# Altium PCB 智能灯_灯泡.PcbDoc
Units mm, origin at the board's own origin, x right, y up, seen from the top; angles counter-clockwise.
Board outline 152.4 x 101.6 mm, 2 copper layers (Top Layer, Bottom Layer); 17 components, 4 nets, 68 pads, 16 vias.
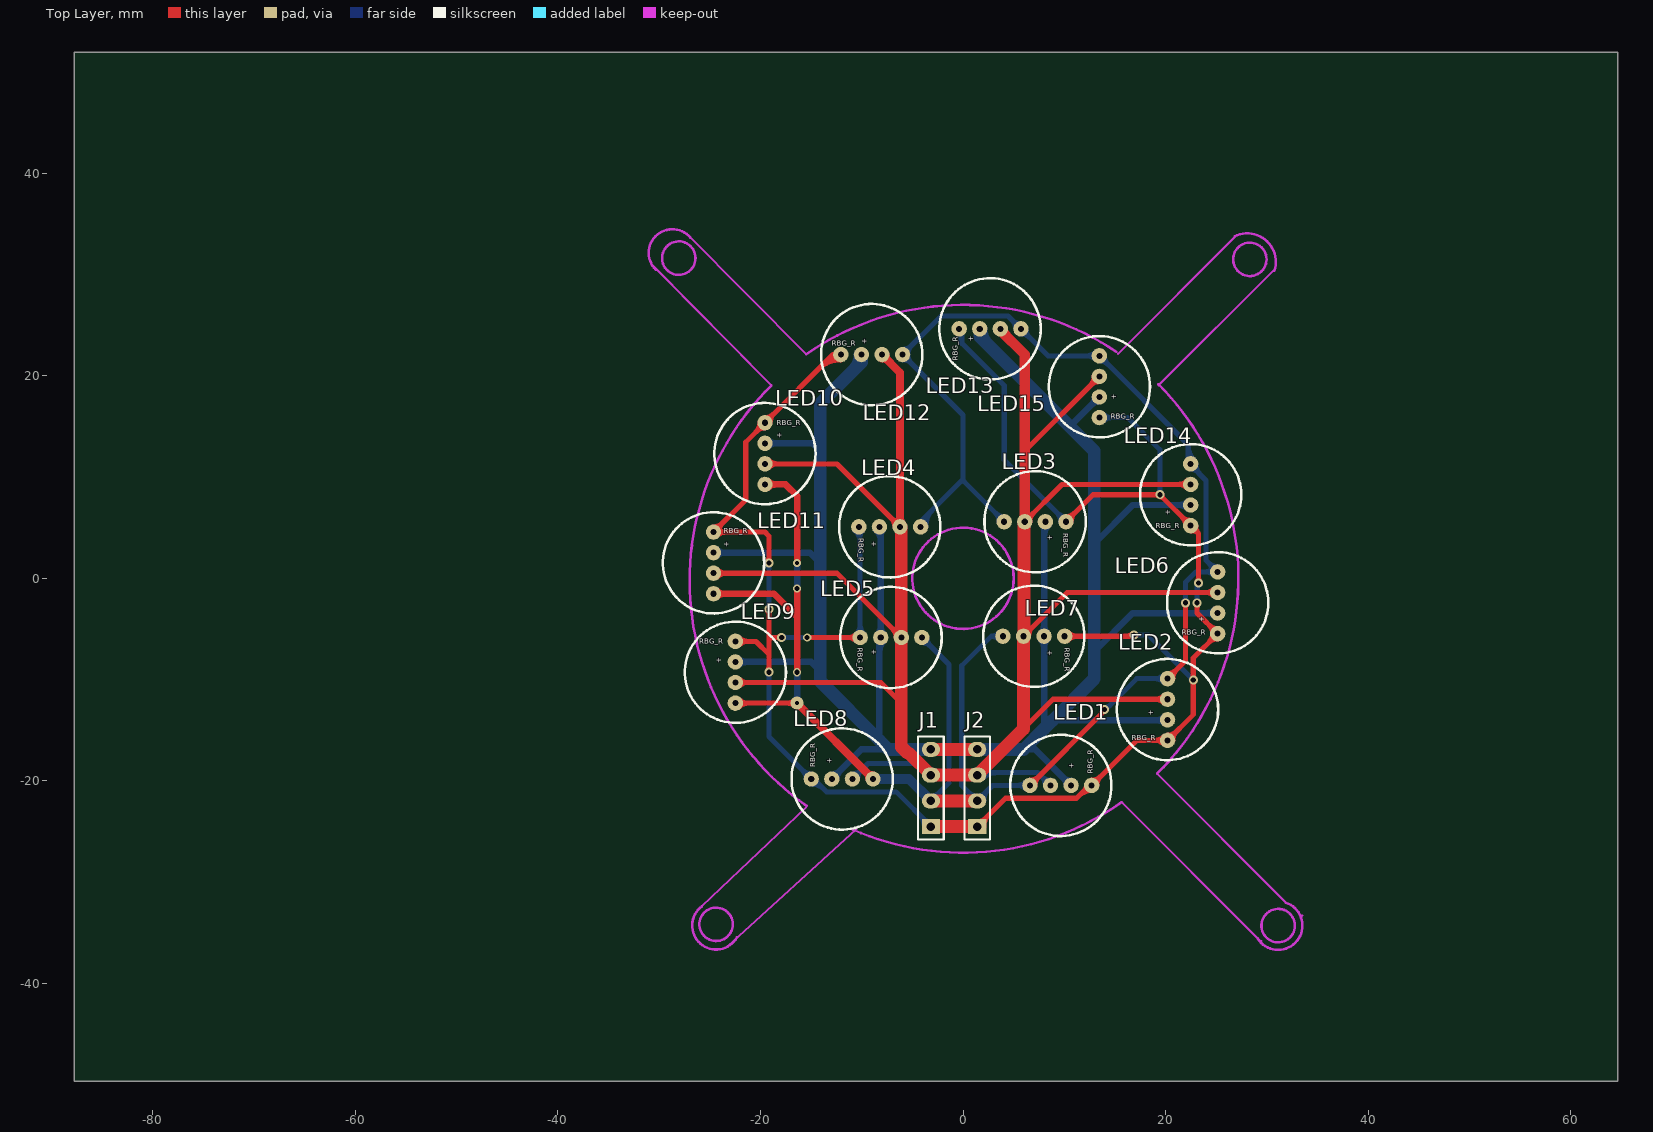
[diagram p0: Top Layer view]
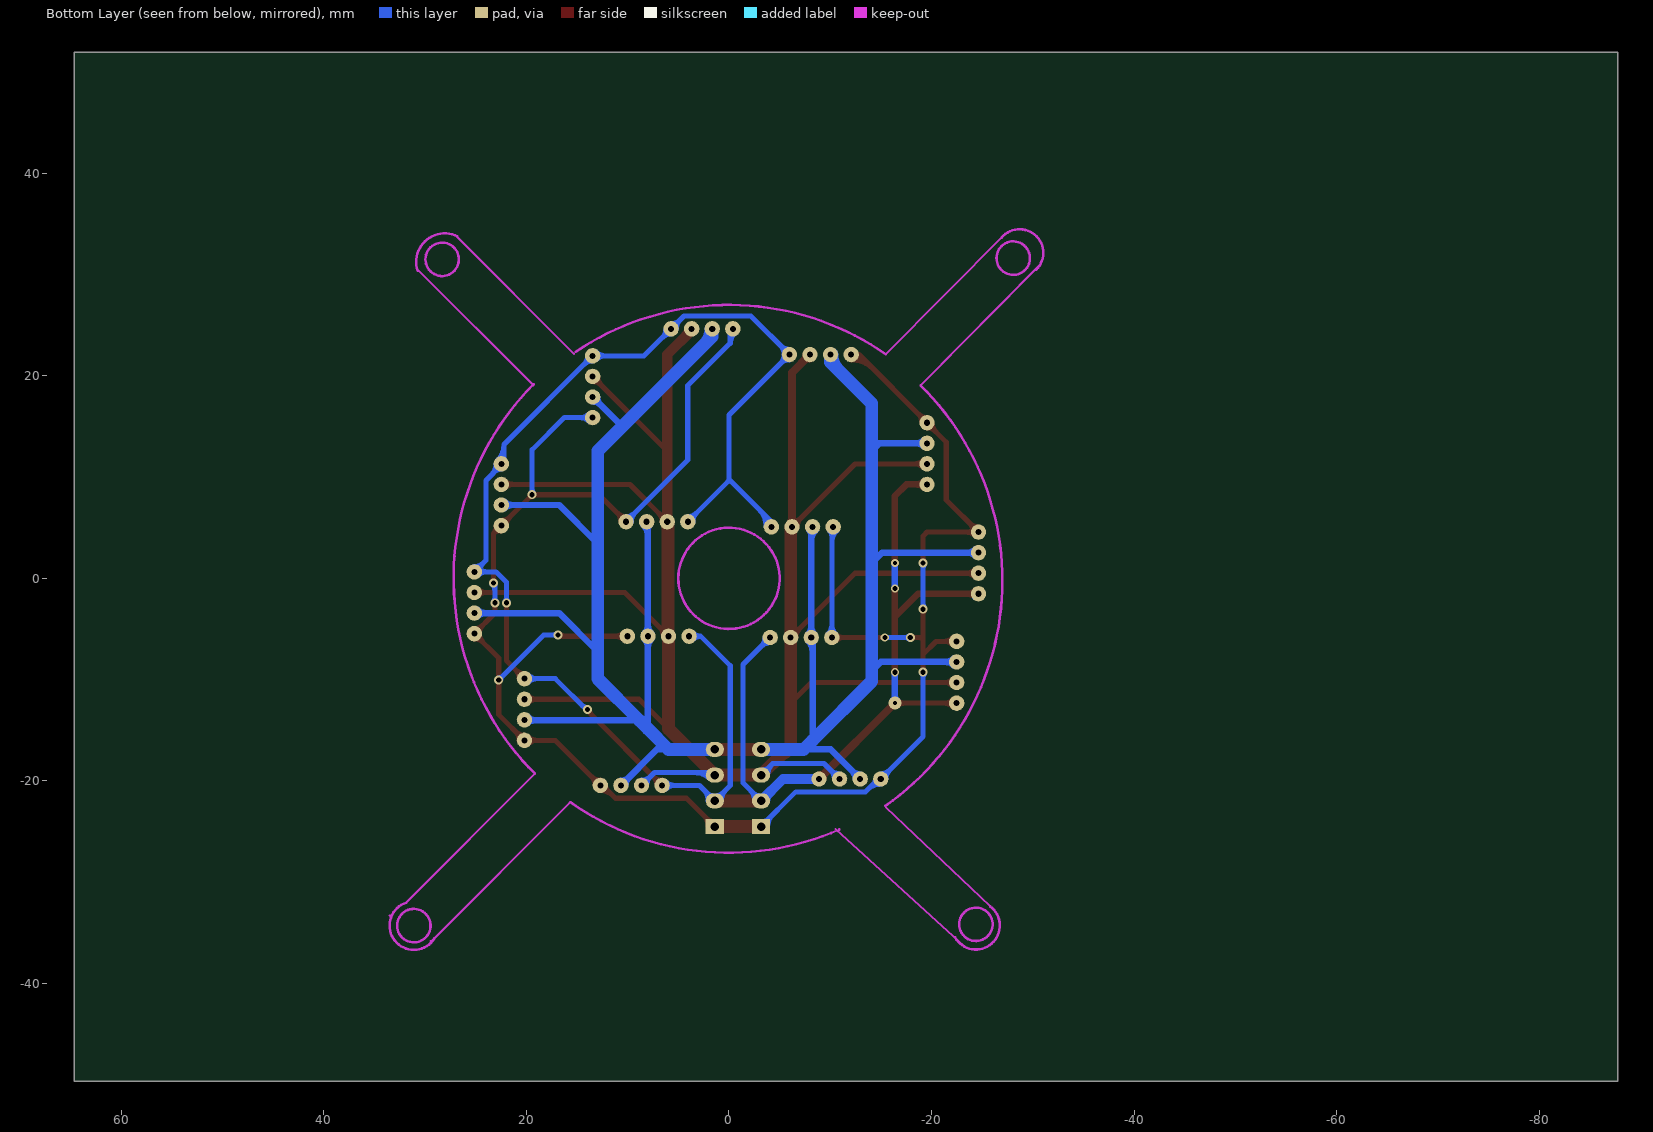
[diagram p1: Bottom Layer view, seen from below]

## Layer stack, top to bottom
Top Solder: solder mask 0.0102, Solder Resist, Dk 3.5
Top Layer: signal copper 0.0356
Dielectric 1: dielectric 0.32, FR-4, Dk 4.8
Bottom Layer: signal copper 0.0356
Bottom Solder: solder mask 0.0102, Solder Resist, Dk 3.5

## Board outline
-87.757,-49.657 64.643,-49.657 64.643,51.943 -87.757,51.943

## Design rules (kind name [scope] priority, off if disabled: settings)
Clearance [All] p1: gap=0.254
PolygonConnect [All] p1: connectstyle=Relief reliefconductorwidth=0.254 reliefentries=4 polygonreliefangle="90 Angle" airgapwidth=0.254
RoutingVias [All] p1: holewidth=0.508 width=0.762 viastyle="Through Hole" minholewidth=0.254 minwidth=0.508 maxholewidth=1.016 maxwidth=1.27
SolderMaskExpansion [All] p1: expansion=0.102
Width [All] p1: maxlimit=1.27 minlimit=0.254 preferedwidth=0.508
29 further rules are at their usual default settings.

## Components (designator, comment, footprint, x,y, rotation, side; value= is the part's Value field where it differs from the comment)
J1 "SIP4" P4_2.54-1 -3.175,-20.701 r90 top
J2 "SIP4" P4_2.54-1 1.397,-20.701 r90 top
LED1 "BGR" 10MMRBG 9.652,-20.447 r180 top
LED2 "BGR" 10MMRBG 20.193,-12.954 r90 top
LED3 "BGR" 10MMRBG 7.112,5.588 r180 top
LED4 "BGR" 10MMRBG -7.239,5.08 r0 top
LED5 "BGR" 10MMRBG -7.112,-5.842 r0 top
LED6 "BGR" 10MMRBG 25.146,-2.413 r90 top
LED7 "BGR" 10MMRBG 6.985,-5.715 r180 top
LED8 "BGR" 10MMRBG -11.938,-19.812 r0 top
LED9 "BGR" 10MMRBG -22.479,-9.271 r270 top
LED10 "BGR" 10MMRBG -19.558,12.319 r270 top
LED11 "BGR" 10MMRBG -24.638,1.524 r270 top
LED12 "BGR" 10MMRBG -9.017,22.098 r0 top
LED13 "BGR" 10MMRBG 2.667,24.638 r0 top
LED14 "BGR" 10MMRBG 22.479,8.255 r90 top
LED15 "BGR" 10MMRBG 13.462,18.923 r90 top

## Footprints (in the part's own frame and the unit in brackets; to place one, negate y for a bottom-side part, rotate by r counter-clockwise, add the part's x,y. Pads: shape width x height; smd on the part's side, far side on the other; paste and mask are expansions set on the pad)
10MMRBG [mil]
  round 60 hole 23.62: 1(-120,0) 2(-40,0) 3(40,0) 4(120,0)
  silkscreen extent -197,-197 197,197
P4_2.54-1 [mm]
  rect 1.5x1.8 hole 0.85: 1(-3.81,0)
  oval 1.5x1.8 hole 0.85: 2(-1.27,0) 3(1.27,0) 4(3.81,0)
  silkscreen extent -5.08,-1.27 5.08,1.27, body extent -5.08,-1.47 5.08,1.45, height 8.56

## Part data
LED1 LED2 LED3 LED4 LED5 LED6 LED7 LED8 LED9 LED10 LED11 LED12 LED13 LED14 LED15: library part LED_4P, "DUAL_LED共阳三色"

## Via types
v1: diameter 0.889, hole 0.508, Top Layer to Bottom Layer, 11 vias
v2: diameter 0.813, hole 0.508, Top Layer to Bottom Layer, 3 vias
v3: diameter 0.813, hole 0.381, Top Layer to Bottom Layer, 1 vias
v4: diameter 1.27, hole 0.381, Top Layer to Bottom Layer, 1 vias

## Nets (pads, with @x,y where several pads share a name; then routed paths per layer and width w, separated by ;. In a path a pad name is that pad's centre, name@x,y a point inside that pad or via, vN(x,y) a via of type N, cw(c..) or ccw(c..) an arc to the next point about the centre after c; other vN are vias at no path point)
5V: J1.4 J2.4 LED1.2 LED2.2 LED3.2 LED4.2 LED5.2 LED6.2 LED7.2 LED8.2 LED9.2 LED10.2 LED11.2 LED12.2 LED13.2 LED14.2 LED15.2 | length 255.1
  Top Layer w1.27: J1.4 J2.4
  Bottom Layer w0.635: LED11.2 -15.113,2.54 -14.097,1.524 ; LED11.2@-24.324,2.226 cw(c-23.565,1.467) -23.565,2.54 cw(c-23.565,3.613) LED11.2@-24.324,2.854 ; LED9.2 -14.986,-8.255 -14.097,-9.144 ; LED9.2@-22.165,-8.569 cw(c-21.406,-9.328) -21.406,-8.255 cw(c-21.406,-7.182) LED9.2@-22.165,-7.941 ; LED10.2 -14.859,13.335 -14.097,12.573 ; LED10.2@-19.244,13.021 cw(c-18.485,12.262) -18.485,13.335 cw(c-18.485,14.408) LED10.2@-19.244,13.649 ; -14.297,8.074 -14.097,8.074 ; LED8.2 -10.033,-16.891 -7.366,-16.891 ; LED8.2@-12.954,-19.367 ccw(c-12.954,-18.294) -12.195,-19.053 ccw(c-11.436,-19.812) LED8.2@-12.509,-19.812 ; LED4.2@-8.569,4.766 cw(c-9.635,3.7) -8.128,3.7 ; LED5.2@-8.442,-6.156 cw(c-8.895,-6.609) -8.255,-6.609 ; LED5.2@-8.442,-5.528 ccw(c-9.201,-4.769) -8.128,-4.769 ccw(c-7.055,-4.769) LED5.2@-7.814,-5.528 ; -8.255,-16.002 -8.255,-5.969 LED5.2 -8.128,4.953 LED4.2 ; -8.255,-7.222 cw(c-6.748,-7.222) LED5.2@-7.814,-6.156 ; -8.128,4.313 cw(c-7.488,4.313) LED4.2@-7.941,4.766 ; 5.969,-16.891 7.112,-16.891 LED1.2 ; LED7.2@7.687,-6.029 cw(c6.928,-6.788) 8.001,-6.788 cw(c9.074,-6.788) LED7.2@8.315,-6.029 ; LED7.2@7.687,-5.401 ccw(c6.928,-4.642) 8.001,-4.642 ccw(c9.074,-4.642) LED7.2@8.315,-5.401 ; LED3.2@7.814,5.274 cw(c7.361,4.821) 8.001,4.821 ; 8.001,-14.859 LED7.2 8.001,5.461 LED3.2 ; 8.001,4.208 cw(c9.508,4.208) LED3.2@8.442,5.274 ; 8.826,-14.034 LED2.2@20.13,-14.034 ; LED1.2@10.223,-20.447 ccw(c9.15,-20.447) 9.909,-19.688 ccw(c10.668,-18.929) LED1.2@10.668,-20.002 ; 10.414,15.113 10.668,15.113 LED15.2 ; 12.954,-7.239 16.764,-3.429 LED6.2 ; 12.954,3.429 16.764,7.239 LED14.2 ; LED15.2@13.018,17.907 cw(c11.944,17.907) 12.703,17.148 cw(c13.462,16.389) LED15.2@13.462,17.462 ; 18.967,-14.034 ccw(c18.967,-12.744) LED2.2@19.879,-13.656 ; 19.273,-14.034 cw(c19.273,-14.89) LED2.2@19.879,-14.284 ; LED14.2@22.165,6.925 ccw(c21.406,6.166) 21.406,7.239 ccw(c21.406,8.312) LED14.2@22.165,7.553 ; LED6.2@24.832,-3.743 ccw(c24.073,-4.502) 24.073,-3.429 ccw(c24.073,-2.356) LED6.2@24.832,-3.115
  Bottom Layer w1.27: -14.097,-10.16 -8.255,-16.002 -7.366,-16.891 J1.4 ; -14.097,-10.033 -14.097,-9.144 -14.097,-3.302 ; -14.097,-3.175 -14.097,1.524 -14.097,8.074 -14.097,12.573 -14.097,17.272 -10.033,21.336 LED12.2 ; -10.789,20.58 ccw(c-12.306,22.098) LED12.2@-10.16,22.098 ; J2.4 5.969,-16.891 8.001,-14.859 8.826,-14.034 12.954,-9.906 12.954,-7.239 12.954,3.429 12.954,12.573 10.414,15.113 1.651,23.876 LED13.2 ; LED13.2@1.778,24.638 ccw(c3.924,24.638) 2.407,23.12 ; LED2.2@20.13,-14.034 LED2.2
RBG_B: J1.2 J2.2 LED1.4 LED2.4 LED3.4 LED4.4 LED5.4 LED6.4 LED7.4 LED8.4 LED9.4 LED10.4 LED11.4 LED12.4 LED13.4 LED14.4 LED15.4 | length 266.2
  Top Layer w0.508: LED9.4 v4(-16.383,-12.319) ; LED9.4@-22.12,-12.678 cw(c-21.253,-13.545) -21.253,-12.319 cw(c-21.253,-11.093) LED9.4@-22.12,-11.96 ; v4@-16.652,-12.588 ccw(c-17.303,-13.239) -17.303,-12.319 ccw(c-17.303,-11.399) v4@-16.652,-12.05 ; LED1.4 13.97,-13.081 v1(13.97,-12.954) ; LED1.4@6.604,-19.939 ccw(c6.604,-18.713) 7.471,-19.58 ccw(c8.338,-20.447) LED1.4@7.112,-20.447 ; 13.555,-13.496 ccw(c13.013,-12.954) v1@13.779,-12.954 ; LED2.4 21.971,-8.128 v1(21.971,-2.413) ; LED2.4@20.193,-9.398 ccw(c20.193,-8.172) 21.06,-9.039 ccw(c21.927,-9.906) LED2.4@20.701,-9.906 ; v1@21.836,-2.548 cw(c21.511,-2.873) 21.971,-2.873 cw(c22.431,-2.873) v1@22.106,-2.548
  Top Layer w0.635: LED11.4 -18.669,-1.524 -16.383,-3.81 ; LED11.4@-24.324,-1.838 cw(c-23.565,-2.597) -23.565,-1.524 cw(c-23.565,-0.451) LED11.4@-24.324,-1.21 ; LED10.4 -17.526,9.271 -16.383,8.128 v3(-16.383,1.524) ; LED10.4@-19.244,8.957 cw(c-18.485,8.198) -18.485,9.271 cw(c-18.485,10.344) LED10.4@-19.244,9.585 ; v2(-16.383,-9.271) -16.383,-3.81 ; v2(-16.383,-1.016) -16.383,-3.81
  Top Layer w0.762: v4(-16.383,-12.319) LED8.4 ; LED8.4@-9.271,-19.812 ccw(c-10.191,-19.812) -9.54,-19.162 ccw(c-8.89,-18.511) LED8.4@-8.89,-19.431
  Top Layer w1.27: J1.2 J2.2
  Bottom Layer w0.508: LED11.4 LED11.4@-24.257,-1.905 ; LED9.4 LED9.4@-22.479,-12.083 ; LED12.4@-5.969,21.59 cw(c-5.969,20.364) -5.102,21.231 cw(c-4.235,22.098) -5.461,22.098 cw(c-4.235,22.098) -5.102,22.965 cw(c-5.969,23.832) LED12.4@-5.969,22.606 ; LED5.4@-4.064,-6.35 cw(c-4.064,-7.576) -3.197,-6.709 cw(c-2.33,-5.842) LED5.4@-3.556,-5.842 ; LED5.4 -1.397,-8.509 -1.397,-20.193 J1.2 ; -3.832,5.947 ccw(c-2.965,5.08) LED4.4 -4.191,5.588 0,9.779 0,16.129 LED12.4 -2.159,25.908 4.445,25.908 LED13.4 8.382,21.971 LED15.4 22.225,13.208 22.225,11.557 LED14.4 22.479,11.199 24.003,9.675 24.003,1.778 LED6.4 22.987,0.635 21.971,-0.381 v1(21.971,-2.413) ; LED4.4@-3.683,5.08 cw(c-1.23,5.08) -2.965,6.814 ; J1.2@-3.025,-21.475 ccw(c-3.025,-20.64) -2.434,-21.23 ; J1.2@-2.529,-21.971 cw(c-0.969,-21.971) -2.072,-20.868 ; 0.064,9.588 LED3.4 ; 0.294,-20.868 cw(c-0.809,-21.971) J2.2@0.751,-21.971 ; 0.656,-21.23 ccw(c1.247,-20.64) J2.2@1.247,-21.475 ; J2.2@1.547,-21.475 ccw(c1.547,-20.64) 2.138,-21.23 ; J2.2@2.043,-21.971 cw(c3.603,-21.971) 2.5,-20.868 ; LED3.4@3.556,5.588 ccw(c2.33,5.588) 3.197,6.455 ccw(c4.064,7.322) LED3.4@4.064,6.096 ; LED7.4@3.56,-6.055 ccw(c2.794,-6.747) 2.794,-5.715 ; LED7.4@3.56,-5.375 cw(c2.794,-4.683) 2.794,-5.715 ; LED7.4 2.794,-5.715 ; LED13.4@5.207,24.638 ccw(c3.981,24.638) 4.848,25.505 ccw(c5.715,26.372) LED13.4@5.715,25.146 ; LED13.4@5.715,24.13 cw(c5.715,22.904) 6.582,23.771 cw(c7.449,24.638) LED13.4@6.223,24.638 ; LED1.4@6.245,-20.806 ccw(c5.378,-21.673) 5.378,-20.447 ccw(c5.378,-19.221) LED1.4@6.245,-20.088 ; LED1.4 2.921,-20.447 J2.2 -0.127,-20.447 -0.127,-8.636 2.794,-5.715 ; LED15.4@13.103,21.612 ccw(c12.236,20.745) 12.236,21.971 ccw(c12.236,23.197) LED15.4@13.103,22.33 ; LED15.4@13.462,21.463 cw(c13.462,20.237) 14.329,21.104 cw(c15.196,21.971) LED15.4@13.97,21.971 ; v1(13.97,-12.954) 13.97,-13.081 17.145,-9.906 LED2.4 ; v1@13.97,-12.763 ccw(c13.97,-11.997) 14.512,-12.539 ; LED2.4@19.834,-10.265 ccw(c18.967,-11.132) 18.967,-9.906 ccw(c18.967,-8.68) LED2.4@19.834,-9.547 ; v1@21.836,-2.278 ccw(c21.511,-1.953) 21.971,-1.953 ccw(c22.431,-1.953) v1@22.106,-2.278 ; 22.225,13.143 ccw(c24.319,13.143) LED14.4@22.838,11.662 ; LED14.4@22.479,10.795 cw(c22.479,9.82) 23.168,10.509 ; LED14.4@22.987,11.303 ccw(c24.465,11.303) 23.42,10.258 ; LED6.4@24.638,0.635 ccw(c23.412,0.635) 24.279,1.502 ccw(c25.146,2.369) LED6.4@25.146,1.143 ; LED6.4@24.787,0.276 ccw(c23.92,-0.591) 23.92,0.635 ccw(c23.92,1.861) LED6.4@24.787,0.994
  Bottom Layer w0.635: v4@-16.608,-12.094 ccw(c-17.15,-11.552) -16.383,-11.552 ccw(c-15.616,-11.552) v4@-16.158,-12.094 ; v4(-16.383,-12.319) v2@-16.383,-9.398 ; v2(-16.383,-1.016) v3(-16.383,1.524)
  Bottom Layer w1.016: LED8.4 -5.334,-19.812 J1.2 ; -3.844,-21.302 cw(c-4.513,-21.971) J1.2@-3.567,-21.971
RBG_G: J1.3 J2.3 LED1.3 LED2.3 LED3.3 LED4.3 LED5.3 LED6.3 LED7.3 LED8.3 LED9.3 LED10.3 LED11.3 LED12.3 LED13.3 LED14.3 LED15.3 | length 269.2
  Top Layer w0.508: LED11.3 -12.446,0.508 LED5.3 ; LED11.3@-24.279,0.149 cw(c-23.412,-0.718) -23.412,0.508 cw(c-23.412,1.734) LED11.3@-24.279,0.867 ; LED9.3 -8.128,-10.287 -6.096,-12.319 ; LED9.3@-22.12,-10.646 cw(c-21.253,-11.513) -21.253,-10.287 cw(c-21.253,-9.061) LED9.3@-22.12,-9.928 ; LED10.3 -12.446,11.303 LED4.3 ; LED10.3@-19.199,10.944 cw(c-18.332,10.077) -18.332,11.303 cw(c-18.332,12.529) LED10.3@-19.199,11.662 ; LED4.3@-6.731,5.08 ccw(c-7.957,5.08) -7.09,5.947 ccw(c-6.223,6.814) LED4.3@-6.223,5.588 ; LED5.3@-6.604,-5.842 ccw(c-7.83,-5.842) -6.963,-4.975 ccw(c-6.096,-4.108) LED5.3@-6.096,-5.334 ; LED13.3@3.683,24.13 cw(c3.683,22.904) 4.55,23.771 cw(c5.417,24.638) LED13.3@4.191,24.638 ; LED13.3 6.096,22.225 6.096,22.102 6.096,21.844 ; 5.969,-14.859 8.89,-11.938 LED2.3 ; LED7.3 6.035,-5.649 10.287,-1.397 LED6.3 LED6.3@25.146,-1.161 ; LED7.3@5.969,-5.207 ccw(c5.969,-3.981) 6.836,-4.848 ccw(c7.703,-5.715) LED7.3@6.477,-5.715 ; LED3.3 9.779,9.271 LED14.3 ; LED3.3@6.096,6.096 ccw(c6.096,7.322) 6.963,6.455 ccw(c7.83,5.588) LED3.3@6.604,5.588 ; 6.096,12.573 LED15.3 ; LED1.3@8.4,-20.447 LED1.3 ; LED15.3@12.954,19.939 cw(c11.728,19.939) 12.595,19.072 cw(c13.462,18.205) LED15.3@13.462,19.431 ; LED2.3@19.834,-12.297 ccw(c18.967,-13.164) 18.967,-11.938 ccw(c18.967,-10.712) LED2.3@19.834,-11.579 ; LED14.3@22.12,8.912 ccw(c21.253,8.045) 21.253,9.271 ccw(c21.253,10.497) LED14.3@22.12,9.63 ; LED6.3@24.787,-1.756 ccw(c23.92,-2.623) 23.92,-1.397 ccw(c23.92,-0.171) LED6.3@24.787,-1.038
  Top Layer w0.762: LED12.3@-8.001,21.717 cw(c-8.001,20.797) -7.351,21.448 cw(c-6.7,22.098) LED12.3@-7.62,22.098 ; LED12.3 -6.223,20.32 LED4.3 ; LED4.3@-6.492,5.349 ccw(c-7.143,6) -6.223,6 ccw(c-5.303,6) LED4.3@-5.954,5.349
  Top Layer w1.016: LED13.3 3.683,24.515 6.096,22.102 ; LED13.3@3.937,24.638 ccw(c4.848,24.638) 4.204,23.994 ; LED3.3 6.096,12.573 6.096,21.844
  Top Layer w1.27: LED4.3 -6.096,4.953 LED5.3 -6.096,-12.319 -6.096,-16.637 -5.461,-17.272 -5.334,-17.272 J1.3 J2.3 5.969,-14.859 LED7.3 ; LED7.3@6.035,-5.649 6.035,5.527 LED3.3
  Bottom Layer w0.508: LED8.3 -9.398,-18.288 -4.318,-18.288 J1.3 ; LED8.3@-10.922,-19.304 ccw(c-10.922,-18.078) -10.055,-18.945 ccw(c-9.188,-19.812) LED8.3@-10.414,-19.812 ; -4.278,-18.328 cw(c-5.381,-19.431) J1.3@-3.821,-19.431 ; -3.916,-18.69 ccw(c-3.325,-18.1) J1.3@-3.325,-18.935 ; J2.3 1.651,-19.177 7.366,-19.177 LED1.3 LED1.3@8.4,-20.447 ; J2.3@1.898,-19.782 cw(c3.358,-21.242) 3.358,-19.177 ; LED1.3@8.128,-20.447 ccw(c6.902,-20.447) 7.769,-19.58 ccw(c8.636,-18.713) LED1.3@8.636,-19.939
RBG_R: J1.1 J2.1 LED1.1 LED2.1 LED3.1 LED4.1 LED5.1 LED6.1 LED7.1 LED8.1 LED9.1 LED10.1 LED11.1 LED12.1 LED13.1 LED14.1 LED15.1 | length 273.5
  Top Layer w0.508: LED11.1@-24.638,5.08 ccw(c-24.638,6.306) -23.771,5.439 ccw(c-22.904,4.572) LED11.1@-24.13,4.572 ; LED11.1@-24.279,4.213 cw(c-23.412,3.346) -23.412,4.572 cw(c-23.412,5.798) LED11.1@-24.279,4.931 ; LED9.1 -20.447,-6.223 -19.177,-7.493 ; LED9.1@-22.12,-6.582 cw(c-21.253,-7.449) -21.253,-6.223 cw(c-21.253,-4.997) LED9.1@-22.12,-5.864 ; -20.445,14.453 ccw(c-21.359,15.367) LED10.1@-20.066,15.367 ; -20.378,14.519 cw(c-19.558,13.699) LED10.1@-19.558,14.859 ; LED10.1@-19.558,15.875 ccw(c-19.558,17.101) -18.691,16.234 ccw(c-17.824,15.367) LED10.1@-19.05,15.367 ; v1@-19.312,-9.136 ccw(c-19.637,-8.811) -19.177,-8.811 ccw(c-18.717,-8.811) v1@-19.042,-9.136 ; v1@-19.312,-3.183 cw(c-19.637,-3.508) -19.177,-3.508 cw(c-18.717,-3.508) v1@-19.042,-3.183 ; v1@-19.312,1.659 ccw(c-19.637,1.984) -19.177,1.984 ccw(c-18.717,1.984) v1@-19.042,1.659 ; v1(-19.177,-9.271) -19.177,-7.493 ; v1(-19.177,-3.048) -19.177,-6.096 ; v1(-19.177,1.524) -19.177,4.191 -19.558,4.572 LED11.1 -21.463,7.747 -21.463,13.435 -19.558,15.34 LED10.1 -12.827,22.098 LED12.1 ccw(c-12.065,20.258) -13.366,21.559 ; v1@-18.042,-5.977 ccw(c-18.367,-6.302) -18.367,-5.842 ccw(c-18.367,-5.382) v1@-18.042,-5.707 ; v1(-17.907,-5.842) -18.923,-5.842 -19.177,-6.096 ; v2(-15.392,-5.842) LED5.1 ; -14.233,20.692 cw(c-12.065,18.524) LED12.1@-12.065,21.59 ; LED5.1@-10.519,-6.201 ccw(c-11.386,-7.068) -11.386,-5.842 ccw(c-11.386,-4.616) LED5.1@-10.519,-5.483 ; J2.1 4.191,-21.717 11.194,-21.717 12.464,-20.447 LED1.1 17.145,-16.002 LED2.1 22.733,-13.462 v1(22.733,-10.033) 22.733,-7.874 LED6.1 23.114,-3.429 v1(23.114,-2.413) ; J2.1@1.547,-24.015 ccw(c1.547,-23.18) J2.1@2.138,-23.77 ; J2.1@2.043,-24.511 cw(c3.603,-24.511) 2.5,-23.408 ; LED7.1 16.764,-5.715 v1(16.891,-5.588) ; LED3.1 12.827,8.255 v1(19.431,8.255) LED14.1 23.255,4.431 ; LED3.1@10.16,6.096 ccw(c10.16,7.322) 11.027,6.455 ccw(c11.894,5.588) LED3.1@10.668,5.588 ; LED7.1@10.392,-6.074 cw(c11.259,-6.941) 11.259,-5.715 cw(c11.259,-4.489) LED7.1@10.392,-5.356 ; 11.43,-21.481 cw(c12.7,-22.751) LED1.1@12.7,-20.955 ; 12,-20.911 ccw(c11.535,-20.447) LED1.1@12.192,-20.447 ; LED1.1@12.7,-19.939 ccw(c12.7,-18.713) 13.567,-19.58 ccw(c14.434,-20.447) LED1.1@13.208,-20.447 ; 16.124,-5.715 ccw(c16.124,-4.821) v1@16.756,-5.453 ; v1@19.296,8.12 ccw(c18.971,7.795) 18.971,8.255 ccw(c18.971,8.715) v1@19.296,8.39 ; v1@19.431,8.064 cw(c19.431,7.605) 19.756,7.93 cw(c20.081,8.255) v1@19.621,8.255 ; LED2.1@19.834,-16.361 ccw(c18.967,-17.228) 18.967,-16.002 ccw(c18.967,-14.776) LED2.1@19.834,-15.643 ; LED2.1@20.193,-15.494 ccw(c20.193,-14.268) 21.06,-15.135 ccw(c21.927,-16.002) LED2.1@20.701,-16.002 ; LED14.1@21.971,5.207 ccw(c20.745,5.207) 21.612,6.074 ccw(c22.479,6.941) LED14.1@22.479,5.715 ; LED14.1@22.521,4.701 cw(c22.597,3.774) 23.254,4.431 ; v1@22.598,-10.168 cw(c22.273,-10.493) 22.733,-10.493 cw(c23.193,-10.493) v1@22.868,-10.168 ; v1@22.598,-9.898 ccw(c22.273,-9.573) 22.733,-9.573 ccw(c23.193,-9.573) v1@22.868,-9.898 ; v1@22.979,-2.548 cw(c22.654,-2.873) 23.114,-2.873 cw(c23.574,-2.873) v1@23.249,-2.548 ; LED14.1@22.985,5.165 ccw(c23.912,5.089) 23.255,4.432 ; v1@23.12,-0.31 ccw(c22.795,0.015) 23.255,0.015 ccw(c23.714,0.015) v1@23.389,-0.31 ; v1(23.255,-0.445) 23.255,4.431 ; LED6.1@25.146,-5.969 ccw(c25.146,-7.195) 24.279,-6.328 ccw(c23.412,-5.461) 24.638,-5.461 ccw(c23.412,-5.461) 24.279,-4.594 ccw(c25.146,-3.727) LED6.1@25.146,-4.953 ; -19.177,-7.493 -19.177,-6.096
  Top Layer w1.27: J1.1 J2.1
  Bottom Layer w0.508: v1@-19.312,-9.406 cw(c-19.637,-9.731) -19.177,-9.731 cw(c-18.717,-9.731) v1@-19.042,-9.406 ; v1@-19.312,-2.913 ccw(c-19.637,-2.588) -19.177,-2.588 ccw(c-18.717,-2.588) v1@-19.042,-2.913 ; v1@-19.312,1.389 cw(c-19.637,1.064) -19.177,1.064 cw(c-18.717,1.064) v1@-19.042,1.389 ; v1(-19.177,-9.271) -19.177,-15.621 LED8.1 -14.75,-19.812 -13.48,-21.082 -6.604,-21.082 J1.1 ; v1(-19.177,-3.048) v1(-19.177,1.524) ; v1(-17.907,-5.842) v2(-15.392,-5.842) ; v1@-17.772,-5.977 cw(c-17.447,-6.302) -17.447,-5.842 cw(c-17.447,-5.382) v1@-17.772,-5.707 ; LED8.1@-15.494,-19.812 ccw(c-16.72,-19.812) -15.853,-18.945 ccw(c-14.986,-18.078) LED8.1@-14.986,-19.304 ; LED8.1@-14.986,-20.32 cw(c-14.986,-22.116) -13.716,-20.846 ; LED8.1@-14.478,-19.812 ccw(c-13.821,-19.812) -14.286,-20.276 ; LED4.1@-10.646,4.721 cw(c-11.82,3.547) -10.16,3.547 ; LED5.1@-10.519,-5.483 ccw(c-11.386,-4.616) -10.16,-4.616 ccw(c-8.934,-4.616) LED5.1@-9.801,-5.483 ; LED4.1 -10.16,4.953 LED5.1 ; -10.16,4.16 cw(c-9.367,4.16) LED4.1@-9.928,4.721 ; -4.278,-23.408 cw(c-5.381,-24.511) J1.1@-3.821,-24.511 ; J1.1@-3.916,-23.77 ccw(c-3.325,-23.18) J1.1@-3.325,-24.015 ; LED13.1@-0.662,24.215 cw(c-1.323,23.218) -0.127,23.218 ; LED13.1 -0.127,24.384 -0.127,23.241 4.064,19.05 4.064,11.684 LED3.1 ; LED3.1@9.652,5.588 ccw(c8.426,5.588) 9.293,6.455 ccw(c10.16,7.322) LED3.1@10.16,6.096 ; LED15.1 16.256,15.875 19.431,12.7 v1(19.431,8.255) ; LED15.1@13.821,15.516 cw(c14.688,14.649) 14.688,15.875 cw(c14.688,17.101) LED15.1@13.821,16.234 ; v1(16.891,-5.588) 18.288,-5.588 v1(22.733,-10.033) ; v1@17.026,-5.723 cw(c17.351,-6.048) 17.351,-5.588 cw(c17.351,-5.128) v1@17.026,-5.453 ; v1@19.296,8.39 ccw(c18.971,8.715) 19.431,8.715 ccw(c19.891,8.715) v1@19.566,8.39 ; v1@22.543,-10.033 ccw(c22.083,-10.033) 22.408,-9.708 ccw(c22.733,-9.383) v1@22.733,-9.842 ; v1@22.979,-2.278 ccw(c22.654,-1.953) 23.114,-1.953 ccw(c23.574,-1.953) v1@23.249,-2.278 ; v1(23.114,-2.413) 23.114,-0.381 23.178,-0.445 v1(23.255,-0.445) ; 23.114,-1.244 cw(c24.054,-1.244) v1@23.389,-0.579

## Keep-outs
Keep-Out Layer:
  circle w0.254: c-24.384,-34.163 r1.65
  circle w0.254: c28.321,31.496 r1.65
  circle w0.254: c31.115,-34.29 r1.65
  circle w0.254: c-28.067,31.623 r1.65
  circle w0.254: c0,0 r5
  lines w0.203: -30.61,30.859 -19.05,19.177 ; -27.243,33.971 -15.501,22.108 ; -25.781,-32.385 -15.494,-22.606 ; -23.241,-36.322 -10.541,-24.765 ; 15.317,22.175 27.051,33.909 ; 15.763,-22.113 15.653,-22.113 29.354,-35.814 29.464,-35.814 ; 19.162,-19.289 31.877,-32.004 ; 19.304,19.05 30.861,30.607 ; 33.274,-33.274 33.528,-33.274
  lines w0.254: -30.355,30.478 cw(c-28.702,32.131) -26.924,33.649 ; -25.781,-32.385 ccw(c-24.384,-34.29) -22.319,-35.437 ; -18.927,19.053 ccw(c0.127,-0.254) -15.449,-22.462 ; -15.501,22.108 cw(c0,0) 15.124,22.368 ; -10.911,-24.798 ccw(c0,0) 15.653,-22.113 ; 19.164,-19.291 ccw(c0,0) 19.292,19.162 ; 26.809,33.772 cw(c28.059,31.245) 30.734,30.353 ; 29.083,-35.56 ccw(c31.115,-34.29) 31.873,-32.017

## Silkscreen, mask and mechanical layers (free items; w line width, h text height)
Top Overlay:
  text "+" at 1.016,23.368 h0.51 r90
  text "+" at -9.525,23.114 h0.51 r90
  text "RBG_R" at -12.954,22.987 h0.51
  text "RBG_R" at -0.508,21.463 h0.51 r90
  text "+" at 15.113,17.653 h0.51 r90
  text "RBG_R" at 14.605,15.748 h0.51
  text "RBG_R" at -18.415,15.113 h0.51
  text "+" at -17.907,13.843 h0.51 r90
  text "+" at 20.447,6.223 h0.51 r90
  text "RBG_R" at 19.05,4.953 h0.51
  text "RBG_R" at -23.622,4.445 h0.51
  text "RBG_R" at 9.906,4.445 h0.51 r270
  text "+" at 8.382,4.318 h0.51 r270
  text "RBG_R" at -10.287,3.937 h0.51 r270
  text "+" at -9.017,3.683 h0.51 r270
  text "+" at -23.114,3.048 h0.51 r90
  text "+" at 23.749,-4.318 h0.51 r90
  text "RBG_R" at 21.59,-5.588 h0.51
  text "RBG_R" at -26.035,-6.477 h0.51
  text "RBG_R" at -10.414,-6.858 h0.51 r270
  text "RBG_R" at 10.033,-6.858 h0.51 r270
  text "+" at -9.017,-6.985 h0.51 r270
  text "+" at 8.382,-7.112 h0.51 r270
  text "+" at -23.876,-8.382 h0.51 r90
  text "+" at 18.796,-13.589 h0.51 r90
  text "RBG_R" at 16.637,-16.002 h0.51
  text "+" at -12.954,-18.288 h0.51 r90
  text "RBG_R" at -14.605,-18.669 h0.51 r90
  text "+" at 10.922,-18.796 h0.51 r90
  text "RBG_R" at 12.827,-19.304 h0.51 r90